# Altium PCB STM32F429_18Bit_20_09.PcbDoc (part 3 of 3)
Units mm, origin at the board's own origin, x right, y up, seen from the top; angles counter-clockwise.
Board outline 101.05 x 79.2 mm, 2 copper layers (Top Layer, Bottom Layer); 115 components, 171 nets, 599 pads, 391 vias.
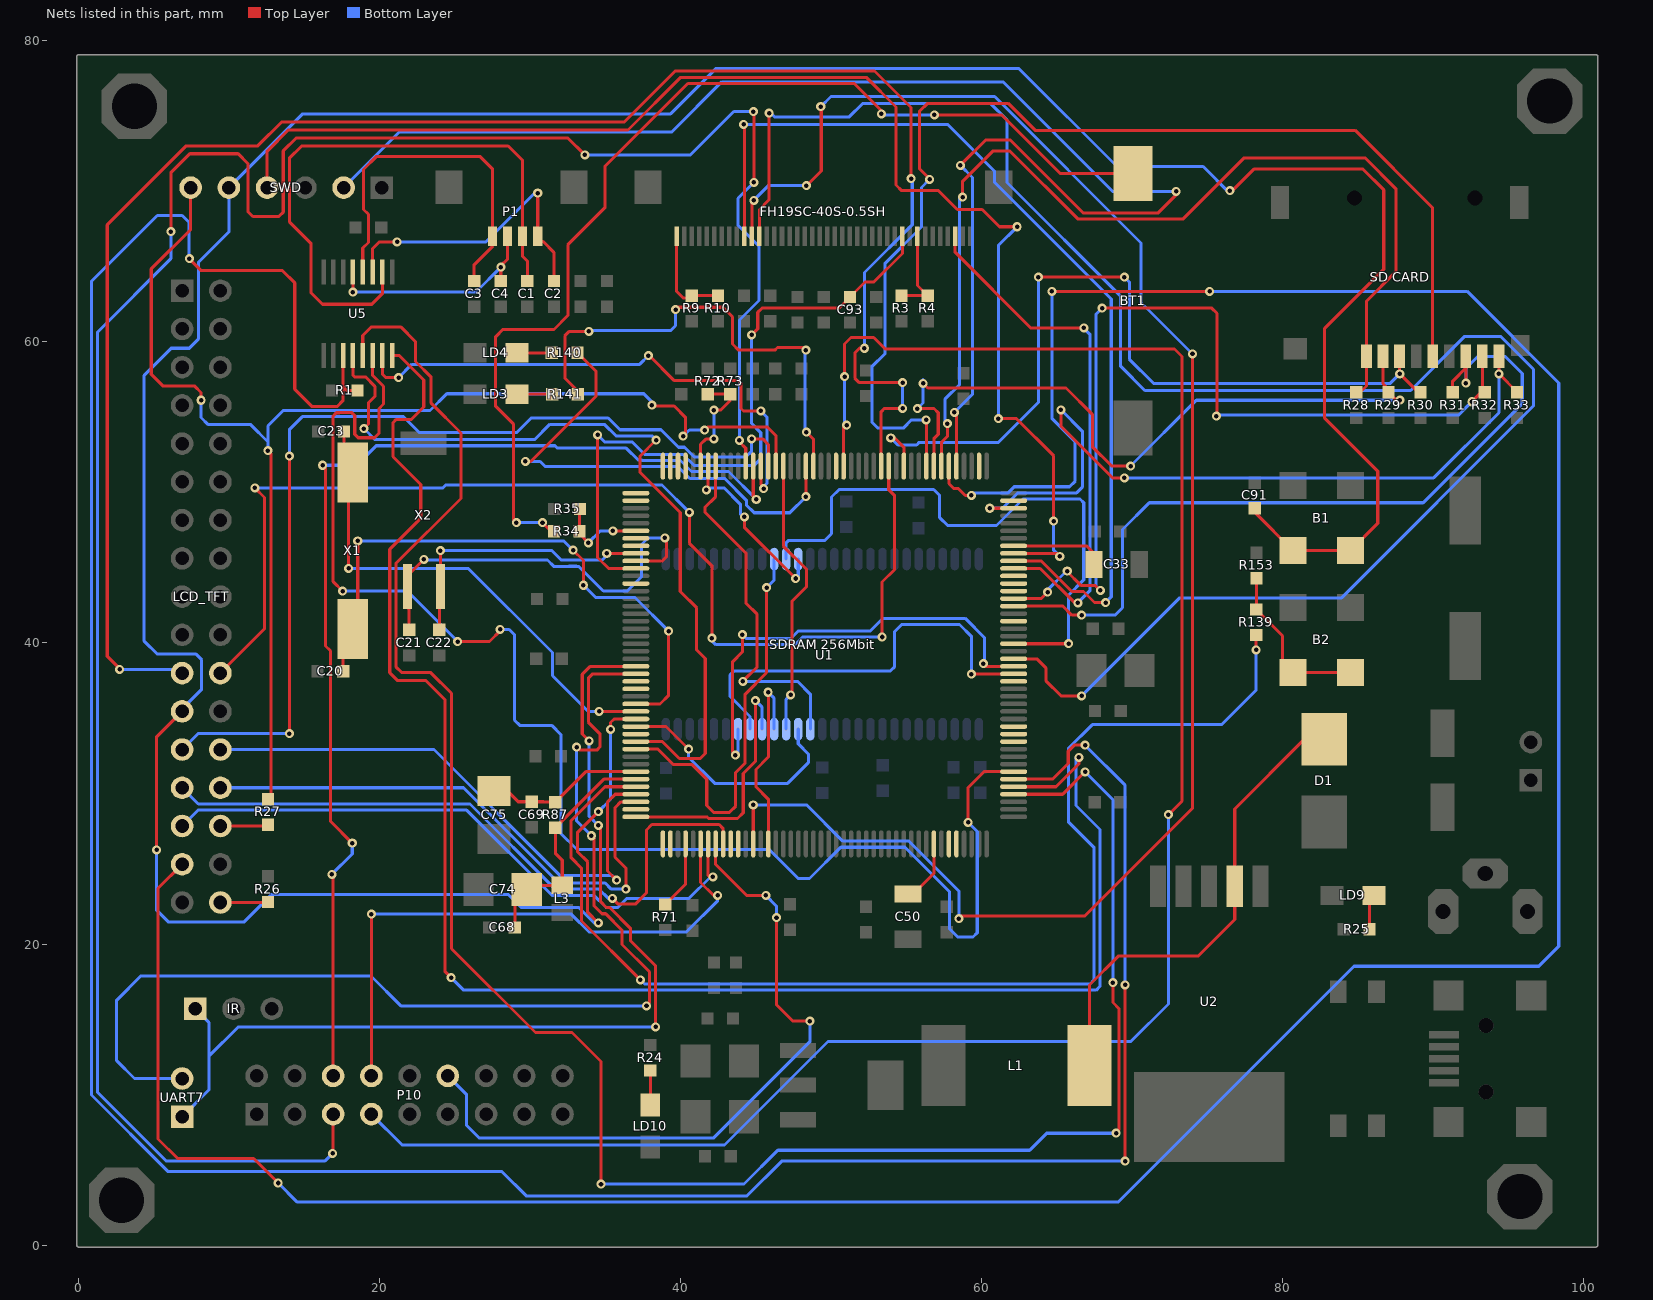
[diagram p3: the nets of this part, all layers, seen from the top]

## Via types
v1: diameter 0.6, hole 0.3, Top Layer to Bottom Layer, 380 vias
v2: diameter 0.8, hole 0.4, Top Layer to Bottom Layer, 9 vias
v3: diameter 1.016, hole 0.508, Top Layer to Bottom Layer, 1 vias
v4: diameter 1.27, hole 0.711, Top Layer to Bottom Layer, 1 vias

## Nets (pads, with @x,y where several pads share a name; then routed paths per layer and width w, separated by ;. In a path a pad name is that pad's centre, name@x,y a point inside that pad or via, vN(x,y) a via of type N, cw(c..) or ccw(c..) an arc to the next point about the centre after c; other vN are vias at no path point) (continued)
LTDC_R5: FH19SC-40S-0.5SH.31 U1.123 | length 64.6
  Top Layer w0.203: FH19SC-40S-0.5SH.31@44.225,67.025 v1@44.225,74.45 ; U1.123@62.116,45.449 63.95,45.449 65.981,43.419 66.756,43.419 67.488,42.687 v1(68.22,42.687)
  Bottom Layer w0.203: v1(44.175,74.45) 57.725,74.45 60.85,71.325 60.85,70.595 68.596,62.85 68.596,43.063 v1(68.22,42.687)
LTDC_R6: FH19SC-40S-0.5SH.30 U1.57 | length 115.6
  Top Layer w0.203: FH19SC-40S-0.5SH.30@44.725,67.025 44.725,69.275 v1(44.85,69.4) ; U1.57@44.816,26.649 v1(44.816,29.25) ; v1(48.35,70.375) 49.331,71.356 v1@49.331,75.625 ; v1(58.475,21.681) 58.644,21.85 66.823,21.85 73.995,29.022 v1(73.995,59.197)
  Bottom Layer w0.203: v1(44.816,29.25) 48.35,29.25 50.764,26.836 55.164,26.836 58.475,23.525 v1(58.475,21.681) ; v1(44.85,69.4) 45.85,70.4 48.375,70.4 v1(48.35,70.375) ; v1(49.3,75.625) 49.975,76.3 60.85,76.3 70.575,66.575 70.575,62.617 v1(73.995,59.197)
LTDC_R7: FH19SC-40S-0.5SH.29 U1.110 | length 121.6
  Top Layer w0.203: FH19SC-40S-0.5SH.29@45.225,67.025 45.225,68.8 45.85,69.425 v1@45.85,75.2 ; U1.110@62.116,38.949 63.651,38.949 64.25,38.35 64.25,37.5 65.261,36.489 v1(66.629,36.489)
  Bottom Layer w0.203: v1@45.925,75.25 46.225,74.95 51.2,74.95 52.075,75.825 60.6,75.825 61.675,74.75 61.675,70.583 69.225,63.033 69.225,58.375 70.825,56.775 88.489,56.775 92.08,60.365 94.46,60.365 96.65,58.175 96.65,55.75 83.9,43 73.14,43 v1(66.629,36.489)
  other v1: 45.875,75.2
LTDC_VSYNC: C93.1 FH19SC-40S-0.5SH.10 U1.11 | length 45.4
  Top Layer w0.203: v1(34.475,53.825) 34.472,53.822 34.472,45.683 35.206,44.949 U1.11@37.016,44.949 ; v1(44.706,60.461) 44.706,60.464 45.115,60.873 45.115,61.965 45.394,62.245 50.507,62.245 C93.1@51.244,62.982 52.237,63.975 52.825,63.975 54.725,65.875 FH19SC-40S-0.5SH.10@54.725,67.025
  Bottom Layer w0.203: v1(34.475,53.825) 34.472,53.822 34.945,53.35 36.782,53.35 37.607,52.525 40.15,52.525 40.875,51.8 44.875,51.8 45.313,52.238 45.313,53.969 44.709,54.574 44.709,60.467 44.706,60.464 v1(44.706,60.461)
NBL0: "SDRAM 256Mbit.15" U1.169 | length 23.6
  Top Layer w0.203: U1.169@42.316,51.749 42.316,49.716 41.6,49 41.6,48.7 44.325,45.975 44.325,42.65 45.075,41.9 45.075,38.4 v1(44.125,37.45)
  Bottom Layer w0.203: v1(44.125,37.45) 47.75,37.45 48.604,36.596 48.604,34.275
NBL1: "SDRAM 256Mbit.39" U1.170 | length 12.1
  Top Layer w0.203: v1(41.7,50.175) 41.816,50.291 U1.170@41.816,51.749 ; v1(44.225,48.375) 44.225,47.687 v1(47.63,44.282)
  Bottom Layer w0.203: v1@41.815,50.307 42.868,50.307 43.954,49.221 43.954,48.571 v1@44.225,48.3 ; v1(47.63,44.282) 47.804,44.456 47.804,45.575
NetB2_2: B2.2 B2.3 R139.1 R153.1 | length 11.1
  Top Layer w0.203: R153.1@78.25,44.3 78.25,42.25 R139.1@78.225,42.225 79.975,40.475 79.975,38.741 B2.2@80.676,38.04 B2.3@84.486,38.04
NetBT1_1: BT1.1 R34.1 | length 72
  Top Layer w0.203: v1(29.083,47.995) 28.9,48.178 28.9,54.525 27.7,55.725 27.7,60.349 28.176,60.825 31.575,60.825 32.5,61.75 32.5,66.45 34.955,68.905 34.955,71.655 40.469,77.169 51.531,77.169 53.325,75.375 v1(53.325,75.15) ; v1(30.815,47.995) 31.385,47.425 R34.1@31.575,47.425 ; v1(56.85,75.075) 61.325,75.075 65.225,71.175 BT1.1@70.05,71.175
  Bottom Layer w0.203: v1(29.083,47.995) v1(30.815,47.995) ; v1(53.325,75.15) 53.4,75.075 v1(56.85,75.075)
NetC33_1: C33.1 U1.125 | length 6.3
  Top Layer w0.203: U1.125@62.116,46.449 66.951,46.449 67.45,45.95 C33.1@67.45,45.225
NetC50_1: C50.1 U1.81 | length 4.2
  Top Layer w0.203: C50.1@55.1,23.325 55.45,23.325 56.816,24.691 U1.81@56.816,26.649
NetD1_2: D1.2 L1.1 U2.2 | length 32
  Top Layer w0.203: L1.1@67.15,11.925 67.15,17.275 69.093,19.217 74.392,19.217 76.8,21.625 U2.2@76.8,23.825 76.8,28.975 81.422,33.597 D1.2@82.75,33.597
NetFH19SC-40S-0.5SH_8: FH19SC-40S-0.5SH.8 R3.1 R4.2 | length 6.4
  Top Layer w0.203: R3.1@54.659,63.073 55.529,63.073 R4.2@56.401,63.073 ; FH19SC-40S-0.5SH.8@55.725,67.025 55.725,63.749 R4.2@56.401,63.073 ; 55.961,63.073 R4.2@56.401,63.073
NetLCD_TFT_30: LCD_TFT.30 R27.2 | length 3.2
  Top Layer w0.203: LCD_TFT.30@9.415,27.84 12.49,27.84 R27.2@12.575,27.925
NetLCD_TFT_34: LCD_TFT.34 R26.2 | length 3.2
  Top Layer w0.203: LCD_TFT.34@9.415,22.76 12.535,22.76 R26.2@12.575,22.8
NetLD3_1: LD3.1 R141.1 | length 2.4
  Top Layer w0.203: LD3.1@29.109,56.526 30.281,56.526 R141.1@31.459,56.526
NetLD4_1: LD4.1 R140.1 | length 2.3
  Top Layer w0.203: LD4.1@29.109,59.276 30.256,59.276 R140.1@31.434,59.276
NetLD9_1: LD9.1 R25.1 | length 2.6
  Top Layer w0.203: R25.1@85.75,20.975 85.75,23.225 LD9.1@86.05,23.225
NetLD10_1: LD10.1 R24.1 | length 2.3
  Top Layer w0.203: LD10.1@37.975,9.3 R24.1@37.975,11.6
NetR34_2: R34.2 R35.2 U1.6 | length 6
  Top Layer w0.203: R35.2@33.3,48.9 33.275,48.875 R34.2@33.275,47.425 33.275,47.237 v1(33.863,46.649) ; v1(35.488,47.449) U1.6@37.016,47.449
  Bottom Layer w0.203: v1(33.863,46.649) 34.663,47.449 v1(35.488,47.449)
NetR71_1: R71.1 U1.48 | length 4.6
  Top Layer w0.203: R71.1@38.975,22.625 40.316,23.966 U1.48@40.316,26.649
NetR72_1: R72.1 R73.1 U1.171 | length 7.6
  Top Layer w0.203: U1.171@41.316,51.749 41.316,53.191 41.662,53.537 42.173,53.537 v1(42.194,53.558) ; R72.1@41.8,56.525 R73.1@43.284,56.525 43.284,56.109 42.638,55.463 v1(42.194,55.463)
  Bottom Layer w0.203: v1(42.194,53.558) v1(42.194,55.463)
NRST: B1.2 B1.3 C91.2 LCD_TFT.23 SWD.5 U1.31 | length 223.6
  Top Layer w0.203: v1(5.186,26.253) 5.186,33.771 LCD_TFT.23@6.875,35.46 ; v1(34.523,21.402) 33.814,22.11 33.814,25.461 33.125,26.15 33.125,27.395 v1(34.523,28.793) ; v1(35.336,34.254) 35.336,34.711 35.574,34.949 U1.31@37.016,34.949 ; v1(76.475,70.05) 76.644,70.05 78.069,71.475 85.325,71.475 86.7,70.1 86.7,64.825 82.775,60.9 82.775,54.938 86.3,51.413 86.3,47.949 B1.3@84.486,46.135 B1.2@80.676,46.135 78.125,48.686 C91.2@78.125,48.95
  Bottom Layer w0.203: v1(5.186,26.253) 5.186,22.239 5.95,21.475 11,21.475 12.825,23.3 28.524,23.3 29.402,22.422 33.233,22.422 34.253,21.402 v1(34.523,21.402) ; LCD_TFT.23@6.875,35.46 6.875,35.625 8.175,36.925 8.175,38.875 7.775,39.275 5.2,39.275 4.356,40.119 4.356,57.781 6.153,59.578 7.353,59.578 7.954,60.179 7.954,65.274 9.981,67.3 SWD.5@9.981,70.249 14.881,75.15 39.325,75.15 42.325,78.15 62.475,78.15 68.975,71.65 74.7,71.65 76.472,69.878 76.644,70.05 v1(76.475,70.05) ; v1(34.523,28.793) 35.336,29.606 v1(35.336,34.254)
PA0: R139.2 U1.40 | length 81.9
  Top Layer w0.203: U1.40@37.016,30.449 34.965,30.449 32.719,28.203 32.719,25.731 33.408,25.042 33.408,21.526 v1(37.317,17.617) ; v1(78.225,39.537) R139.2@78.225,40.525
  Bottom Layer w0.203: v1(37.317,17.617) 37.592,17.342 67.192,17.342 67.442,17.592 67.442,26.433 65.75,28.125 65.75,32.985 67.342,34.577 75.927,34.577 78.225,36.875 v1(78.225,39.537)
PA1: LCD_TFT.26 U1.41 | length 37.5
  Top Layer w0.203: v1(35.742,24.246) 35.138,24.851 35.138,29.446 35.641,29.949 U1.41@37.016,29.949
  Bottom Layer w0.203: LCD_TFT.26@9.415,32.92 23.605,32.92 31.985,24.54 35.449,24.54 v1(35.742,24.246)
PA2: LCD_TFT.28 U1.42 | length 37
  Top Layer w0.203: v1(36.347,23.642) 36.347,25.053 35.625,25.775 35.625,29.057 36.018,29.449 U1.42@37.016,29.449
  Bottom Layer w0.203: LCD_TFT.28@9.415,30.38 25.57,30.38 31.902,24.048 34.98,24.048 35.387,23.642 v1(36.347,23.642)
PA4: P10.8 U1.50 | length 39.5
  Top Layer w0.203: P10.8@19.445,11.24 v1(19.445,21.986) ; U1.50@41.316,26.649 41.316,24.088 42.173,23.23 v1(42.448,23.23)
  Bottom Layer w0.203: v1(19.445,21.986) 32.729,21.986 33.918,20.797 40.37,20.797 42.448,22.875 v1(42.448,23.23)
PA5: LCD_TFT.29 U1.51 | length 41.7
  Top Layer w0.203: U1.51@41.816,26.649 41.816,24.549 41.939,24.425 42.125,24.425 42.131,24.431 v1(42.131,24.459)
  Bottom Layer w0.203: LCD_TFT.29@6.875,27.84 7.93,28.895 25.78,28.895 31.44,23.235 34.218,23.235 35.031,22.422 35.819,22.422 36.433,23.037 40.551,23.037 41.939,24.425 42.125,24.425 42.131,24.431 v1(42.131,24.459)
PA6: P10.12 U1.52 | length 46.8
  Top Layer w0.203: U1.52@42.316,26.649 42.316,25.279 44.364,23.23 v1(45.648,23.23) ; v1(46.36,21.757) 46.36,15.966 47.433,14.892 48.575,14.892 v1(48.575,14.875)
  Bottom Layer w0.203: P10.12@24.525,11.24 25.775,9.99 25.775,7.95 26.6,7.125 42.2,7.125 48.575,13.5 v1@48.575,14.892 ; v1(45.648,23.23) 46.36,22.519 v1(46.36,21.757)
PA7: LCD_TFT.27 U1.53 | length 44.9
  Top Layer w0.203: v1(35.463,23.037) 35.85,22.65 36.975,22.65 37.725,23.4 37.725,27.58 38.079,27.934 42.55,27.934 42.816,27.668 U1.53@42.816,26.649
  Bottom Layer w0.203: LCD_TFT.27@6.875,30.38 7.954,29.301 25.999,29.301 31.658,23.642 34.574,23.642 35.179,23.037 v1(35.463,23.037)
PA8: U1.119
PA9: U1.120
PA10: U1.121
PA11: FH19SC-40S-0.5SH.3 U1.122 | length 35.7
  Top Layer w0.203: FH19SC-40S-0.5SH.3@58.225,67.025 58.225,65.95 63.251,60.924 v1(66.772,60.924) ; U1.122@62.116,44.949 63.876,44.949 66.164,42.661 v1(66.375,42.661)
  Bottom Layer w0.203: v1(66.375,42.661) 67.178,43.465 67.178,60.518 v1(66.772,60.924)
PA13: SWD.4 U1.124 | length 89.5
  Top Layer w0.203: SWD.4@12.521,70.249 12.521,72.67 13.921,74.071 36.496,74.071 40,77.575 52.325,77.575 54.3,75.6 54.3,70.425 54.675,70.05 57.125,70.05 58.375,68.8 60.025,68.8 61.175,67.65 v1(62.35,67.65) ; v1@61.011,54.9 62.308,54.9 64.775,52.433 v1(64.775,48.097) ; U1.124@62.116,45.949 64.975,45.95 v1(65.175,45.75)
  Bottom Layer w0.203: v1(61.1,54.9) 61.1,66.4 v1(62.35,67.65) ; v1(64.775,48.097) 64.775,46.15 v1(65.175,45.75)
PA14: SWD.2 U1.137 | length 99.7
  Top Layer w0.203: v1(58.171,55.311) 58.318,55.163 58.318,53.159 58.316,53.156 U1.137@58.316,51.749 ; v1(58.575,71.725) 60.275,73.425 61.875,73.425 66.725,68.575 71.725,68.575 v1@72.95,69.8
  Bottom Layer w0.203: SWD.2@17.601,70.249 21.301,73.95 39.4,73.95 42.725,77.275 61.4,77.275 68.675,70 v1(72.9,70) ; v1(58.171,55.311) 59.381,56.521 59.381,70.919 v1(58.575,71.725)
PA15: LCD_TFT.31 U1.138 | length 217.9
  Top Layer w0.203: LCD_TFT.31@6.875,25.3 5.275,23.7 5.275,7.05 6.575,5.75 11.625,5.75 v1(13.25,4.125) ; U1.138@57.816,51.749 57.816,50.584 58.15,50.25 58.45,50.25 58.901,49.799 v1(59.301,49.799) ; v1(64.648,63.362) v1@75.125,63.362
  Bottom Layer w0.203: v1(13.25,4.125) 14.525,2.85 69.05,2.85 84.725,18.525 97,18.525 98.325,19.85 98.325,57.275 92.238,63.362 75.137,63.362 v1(75.125,63.35) ; v1(59.301,49.799) 59.479,49.977 61.752,49.977 62.153,50.378 65.828,50.378 66.2,50.75 66.2,53.375 64.648,54.927 v1(64.648,63.362)
PB3: R27.1 SWD.6 U1.161 | length 88.5
  Top Layer w0.203: SWD.6@7.441,70.249 7.441,67.466 4.825,64.85 4.825,57.85 5.612,57.063 7.712,57.063 8.133,56.642 v1(8.133,56.123) ; R27.1@12.575,29.625 12.775,29.825 12.775,52.573 v1(12.578,52.771) ; v1(38.075,55.8) 38.075,55.738 39.557,55.738 40.325,54.97 40.325,53.899 v1(40.162,53.736) ; v1(41.584,54.142) 41.783,54.341 45.753,54.341 46.316,53.778 U1.161@46.316,51.749
  Bottom Layer w0.203: v1(8.133,56.123) 8.133,54.98 8.613,54.5 11.432,54.5 12.578,53.355 ; v1(12.578,52.771) 12.578,53.355 ; v1@38.075,55.738 38.075,56.025 37.544,56.556 24.456,56.556 23.337,55.437 13.588,55.437 12.578,54.426 12.578,53.355 ; v1(40.162,53.736) 40.568,54.142 v1(41.584,54.142)
PB4: LCD_TFT.25 U1.162 | length 64.4
  Top Layer w0.203: v1(14,33.975) v1(14,52.415) ; v1(44.709,53.558) 45.442,53.558 45.816,53.184 U1.162@45.816,51.749
  Bottom Layer w0.203: LCD_TFT.25@6.875,32.92 7.93,33.975 v1(14,33.975) ; v1(14,52.415) 14,54.168 14.863,55.031 21.578,55.031 22.639,53.969 29.083,53.969 30.064,54.95 35.175,54.95 35.962,54.163 38.689,54.163 39.852,53 40.25,53 40.9,52.35 44.325,52.35 44.709,52.734 v1(44.709,53.558)
PB5: U1.163 U5.15 | length 36.6
  Top Layer w0.203: U5.15@20.175,59.1 20.175,57.873 20.423,57.625 v1(21.25,57.625) ; v1(37.851,59.095) 37.901,59.095 39.572,57.425 43.839,57.425 43.997,57.266 43.997,55.578 44.163,55.412 v1(45.318,55.412) ; U1.163@45.316,51.749 45.316,50.563 45.5,50.379 v1(45.5,50.25)
  Bottom Layer w0.203: v1(21.25,57.625) 22.136,58.511 37.266,58.511 v1(37.851,59.095) ; v1(45.318,55.412) 45.72,55.011 45.72,50.599 45.5,50.379 v1(45.5,50.25)
PB6: P10.6 U1.164 | length 75.1
  Top Layer w0.203: v1(16.21,51.805) 16.219,51.805 16.4,51.624 16.4,39.8 16.725,39.475 16.725,28.15 v1(18.175,26.7) ; v1(16.819,24.627) 16.905,24.627 P10.6@16.905,11.24 ; U1.164@44.816,51.749 44.816,51.064 44.815,49.743 v1(45.013,49.545)
  Bottom Layer w0.203: v1(16.21,51.805) 18.475,51.805 19.772,53.103 31.646,53.103 31.805,52.944 36.375,52.944 37.169,52.15 37.407,52.15 37.439,52.119 39.982,52.119 40.707,51.394 43.165,51.394 v1(45.013,49.545) ; v1(16.819,24.627) 18.175,25.983 v1(18.175,26.7)
PB7: P10.5 U1.165 | length 157.7
  Top Layer w0.203: v1(6.126,67.325) 6.126,71.236 7.39,72.5 10.6,72.5 11.257,71.843 11.257,68.643 11.575,68.325 13.3,68.325 13.594,68.619 13.594,72.694 14.45,73.55 32.5,73.55 v1(33.625,72.425) ; v1@16.905,6.1 P10.5@16.905,8.7 ; v1(43.896,53.456) 43.896,53.355 44.316,52.935 U1.165@44.316,51.749 ; v1(44.861,70.601) v1@44.861,75.3
  Bottom Layer w0.203: v1(6.126,67.325) 6.126,65.526 1.262,60.662 1.262,10.138 5.8,5.6 16.375,5.6 v1(16.875,6.1) ; v1(33.625,72.425) 40.65,72.425 43.525,75.3 v1(44.825,75.3) ; v1(43.896,53.456) 43.896,61.457 45.191,62.753 45.191,66.36 43.8,67.751 43.8,69.54 v1(44.861,70.601)
PB12: U1.92 U5.13 | length 138.7
  Top Layer w0.203: U5.13@18.875,59.1 18.875,60.425 19.45,61 21.392,61 22.375,60.017 22.375,58.7 23.419,57.656 23.419,55.931 25.4,53.95 25.4,49.6 21.075,45.275 21.075,38.425 21.475,38.025 23.4,38.025 24.775,36.65 24.775,19.694 30.344,14.125 32.775,14.125 34.701,12.199 v1(34.701,4.053) ; U1.92@62.116,29.949 65.372,29.949 v1(66.857,31.435) ; v1(68.712,17.439) 68.712,16.113 69.118,15.707 69.118,7.635 v1(68.915,7.432)
  Bottom Layer w0.203: v1(34.701,4.053) 44.203,4.053 46.45,6.3 63.175,6.3 64.307,7.432 v1(68.915,7.432) ; v1(66.857,31.435) 68.712,29.58 v1(68.712,17.439)
PB13: U1.93 U5.16 | length 113.3
  Top Layer w0.203: U5.16@20.825,59.1 21.3,59.1 22.925,57.475 22.925,55.675 22.106,54.856 21.106,54.856 20.883,54.633 20.883,52.374 22.725,50.532 22.725,48.275 20.669,46.219 20.669,38.031 21.2,37.5 23.075,37.5 24.325,36.25 24.325,18.189 v1(24.744,17.769) ; U1.93@62.116,30.449 64.924,30.449 66.451,31.976 v1(66.451,32.4)
  Bottom Layer w0.203: v1(24.744,17.769) 25.578,16.936 67.599,16.936 67.848,17.185 67.848,27.602 66.253,29.197 66.253,32.4 v1(66.451,32.4)
PB14: R1.2 U1.94 U5.11 | length 194.9
  Top Layer w0.203: v1(7.35,65.525) 8.141,64.734 13.543,64.734 14.356,63.921 14.356,56.86 15.516,55.7 17.158,55.7 17.575,56.117 17.575,57.012 ; U5.11@17.575,59.1 17.575,57.012 ; R1.2@18.525,56.775 17.812,56.775 17.575,57.012 ; U1.94@62.116,30.949 64.699,30.949 65.74,31.99 65.74,32.815 66.138,33.213 v1(66.857,33.213) ; v1(69.524,5.577) v1(69.524,17.287)
  Bottom Layer w0.203: v1@7.345,65.525 7.345,67.93 6.875,68.4 5.225,68.4 0.856,64.031 0.856,9.969 5.95,4.875 28.125,4.875 29.725,3.275 44.4,3.275 46.702,5.577 v1(69.524,5.577) ; v1(66.857,33.213) 69.524,30.546 v1(69.524,17.287)
PB15: U1.95 U5.14 | length 98.4
  Top Layer w0.203: v1(17.531,43.449) 16.905,44.075 16.905,55.08 17.119,55.294 17.326,55.294 17.333,55.3 18.15,55.3 18.343,55.107 18.343,53.863 18.572,53.634 19.659,53.634 19.95,53.925 19.95,55.565 20.256,55.872 20.256,57.049 19.525,57.78 U5.14@19.525,59.1 ; v1(25.176,40.096) 27.296,40.096 v1@28.05,40.85 ; v1(59.085,28.082) 59.085,30.385 60.149,31.449 U1.95@62.116,31.449
  Bottom Layer w0.203: v1(17.531,43.449) 21.823,43.449 v1(25.176,40.096) ; v1(28,40.9) 28.6,40.9 28.95,40.55 28.95,34.875 29.3,34.525 31.425,34.525 32.034,33.916 32.034,27.345 33.106,26.274 45.876,26.274 47.8,24.35 48.55,24.35 50.63,26.43 54.895,26.43 57.866,23.459 57.866,20.995 58.399,20.462 59.415,20.462 59.695,20.741 59.695,27.472 v1(59.085,28.082)
PC0: "SDRAM 256Mbit.16" U1.32 | length 16.4
  Top Layer w0.203: U1.32@37.016,34.449 39.019,34.449 v1(40.518,32.951)
  Bottom Layer w0.203: v1(40.518,32.951) 40.518,32.407 42.248,30.677 47.102,30.677 48.475,32.05 48.475,32.625 47.804,33.296 47.804,34.275
PC1: U1.33
PC2: U1.34 U5.12 | length 55
  Top Layer w0.203: U5.12@18.225,59.1 18.225,57.775 18.325,57.675 19.05,57.675 19.675,57.05 19.675,56.375 19.258,55.958 19.258,54.549 v1(18.953,54.244) ; U1.34@37.016,33.449 38.776,33.449 39.901,32.324 41.299,32.324 41.627,32.652 41.627,38.966 41.056,39.537 41.056,42.333 39.964,43.425 39.964,48.661 37.3,51.325 37.3,52.418 v1(38.359,53.477)
  Bottom Layer w0.203: v1(18.953,54.244) 19.688,53.509 30.286,53.509 31.302,54.525 34.925,54.525 35.694,53.756 38.079,53.756 v1(38.359,53.477)
PC3: "SDRAM 256Mbit.37" U1.35 | length 27
  Top Layer w0.203: U1.35@37.016,32.949 38.486,32.949 39.518,31.917 40.758,31.917 41.725,30.95 41.725,29.2 42.178,28.747 43.24,28.747 43.65,29.157 43.65,31.4 44.277,32.027 44.277,36.602 45.699,38.024 v1(45.699,43.677)
  Bottom Layer w0.203: v1(45.699,43.677) 46.204,44.182 46.204,45.575
PC4: U1.54
PC5: U1.55
PC6: U1.115
PC8: "SD CARD.7" R31.2 U1.117 | length 54.2
  Top Layer w0.203: U1.117@62.116,42.449 65.376,42.449 65.976,41.849 v1(66.629,41.849) ; R31.2@91.28,56.65 91.28,57.393 92.15,58.263 ; 92.15,59.05 92.15,58.263 ; v1(92.156,57.266) 92.15,57.272 92.15,58.263
  Bottom Layer w0.203: v1(66.629,41.849) 68.849,41.849 69.347,42.347 69.347,47.538 71.125,49.316 89.316,49.316 95.9,55.9 95.9,57.9 94.775,59.025 92.949,59.025 92.156,58.232 v1(92.156,57.266)
PC9: "SD CARD.8" R32.2 U1.118 | length 61.6
  Top Layer w0.203: U1.118@62.116,42.949 63.949,42.949 v1(64.375,43.375) ; v1(65.675,44.775) 65.625,44.775 66.575,43.825 67.523,43.825 67.848,43.5 v1(67.875,43.5) ; v1(67.991,62.245) 75.28,62.245 75.625,61.9 v1@75.625,55.315 ; v1(92.55,56.025) 93.175,56.65 R32.2@93.415,56.65 93.25,56.815 93.25,59.05
  Bottom Layer w0.203: v1(64.375,43.375) 64.35,43.4 64.35,43.5 65.625,44.775 v1(65.675,44.775) ; v1@67.848,43.5 v1(67.875,43.5) 67.584,43.791 67.584,61.838 v1(67.991,62.245) ; v1(75.575,55.075) 75.636,55.136 91.661,55.136 v1(92.55,56.025)
PC10: "SD CARD.1" R28.2 U1.139 | length 68.3
  Top Layer w0.203: U1.139@57.316,51.749 57.316,53.333 57.713,53.73 v1(57.713,54.574) ; v1(58.725,69.625) 58.725,70.675 60.725,72.675 61.875,72.675 66.4,68.15 73.35,68.15 77.425,72.225 85.45,72.225 87.5,70.175 87.5,64.65 85.55,62.7 85.55,59.05 85.55,57.075 85.125,56.65 R28.2@84.875,56.65
  Bottom Layer w0.203: v1(57.713,54.574) 57.566,54.722 57.566,56.216 58.526,57.176 v1@58.526,69.625
PC11: "SD CARD.2" R29.2 U1.140 | length 48
  Top Layer w0.203: v1(55.725,55.575) 56.825,55.575 57.106,55.294 57.106,53.856 56.816,53.566 U1.140@56.816,51.749 ; v1(56.1,57.25) 56.414,56.936 65.589,56.936 67.34,55.185 67.34,53.035 68.62,51.755 v1(69.88,51.755) ; 86.65,59.05 86.65,57.225 87.01,56.865 R29.2@87.01,56.65 87.535,56.125 v1(87.775,56.125)
  Bottom Layer w0.203: v1(55.725,55.575) 56.088,55.938 56.088,57.488 56.1,57.5 v1(56.1,57.25) ; v1(69.88,51.755) 74.25,56.125 v1(87.775,56.125)
PC12: "SD CARD.5" U1.141 | length 76.7
  Top Layer w0.203: v1(56.3,54.825) 56.3,54.768 56.316,54.784 U1.141@56.316,51.749 ; v1(56.525,70.8) 56.55,70.825 55.85,71.525 55.85,75.3 56.4,75.85 61.75,75.85 63.55,74.05 84.8,74.05 89.95,68.9 89.95,59.05
  Bottom Layer w0.203: v1(56.3,54.825) 55.331,54.825 54.78,54.274 53.101,54.274 52.691,54.684 52.691,58.349 53.575,59.234 53.575,65.225 55.986,67.636 55.986,70.261 v1(56.525,70.8)
PC13: U1.8
PC14: C22.1 U1.9 X2.1 | length 18.8
  Top Layer w0.203: C22.1@23.959,40.876 23.959,42.255 24.034,42.329 X2.1@24.034,43.741 v1(24.034,46.131) ; v1(35.082,45.949) U1.9@37.016,45.949
  Bottom Layer w0.203: v1(24.034,46.131) 31.452,46.131 32.083,45.5 32.411,45.5 32.412,45.501 33.25,45.501 33.251,45.5 34.766,45.5 35.082,45.816 v1(35.082,45.949)
PC15: C21.1 U1.10 X2.2 | length 28.4
  Top Layer w0.203: C21.1@21.959,40.876 21.959,42.23 21.835,42.354 X2.2@21.835,43.741 21.835,44.451 v1(22.941,45.557) ; U1.10@37.016,45.449 38.774,45.449 39.049,45.724 39.049,46.975 v1(38.95,46.975)
  Bottom Layer w0.203: v1(22.941,45.557) 22.992,45.506 31.145,45.506 31.558,45.094 32.579,45.094 32.58,45.095 33.081,45.095 33.083,45.094 33.209,45.094 34.853,43.449 36.454,43.449 37.393,44.389 37.393,46.543 37.825,46.975 v1@39.049,46.975
PD2: "SD CARD.3" R30.2 U1.144 | length 55.1
  Top Layer w0.203: v1(53.95,53.625) 54.2,53.625 54.816,53.009 U1.144@54.816,51.749 ; v1(63.759,64.302) v1(69.474,64.302) ; v1@87.75,57.876 87.75,59.05 ; v1(87.762,57.876) 88.988,56.65 R30.2@89.145,56.65
  Bottom Layer w0.203: v1(53.95,53.625) 54.42,53.155 55.669,53.155 55.843,53.329 61.104,53.329 63.759,55.984 v1(63.759,64.302) ; v1(69.474,64.302) 69.8,63.976 69.8,58.85 71.4,57.25 87.136,57.25 v1(87.762,57.876)
PD4: LCD_TFT.22 U1.146 | length 76.1
  Top Layer w0.203: LCD_TFT.22@9.415,38 12.35,40.935 12.35,49.664 v1(11.709,50.304) ; v1(40.568,48.681) 40.568,46.632 42.067,45.133 v1(42.067,40.325) ; v1(53.37,40.396) 53.37,44.045 54.205,44.88 54.205,49.779 53.816,50.168 U1.146@53.816,51.749
  Bottom Layer w0.203: v1(11.709,50.304) 24.199,50.304 24.402,50.508 36.751,50.508 36.765,50.493 38.757,50.493 v1(40.568,48.681) ; v1(42.067,40.325) 42.067,40.147 42.326,39.888 47.588,39.888 48.096,40.396 v1(53.37,40.396)
PD5: LCD_TFT.21 U1.147 | length 122.6
  Top Layer w0.203: v1@2.725,38.293 1.9,39.118 1.9,67.775 7.15,73.025 11.9,73.025 13.475,74.6 36.225,74.6 39.625,78 52.875,78 55.3,75.575 v1(55.3,70.85) ; v1(52.202,59.578) 51.878,59.578 51.567,59.267 51.567,57.59 51.867,57.29 v1(54.742,57.29) ; U1.147@53.316,51.749 53.316,55.366 53.54,55.59 v1(54.742,55.59)
  Bottom Layer w0.203: v1(2.725,38.25) 6.625,38.25 LCD_TFT.21@6.875,38 ; v1(52.202,59.578) 52.202,64.607 55.377,67.782 v1@55.377,70.85 ; v1(54.742,55.59) v1(54.742,57.29)
PD11: U1.99
PD12: U1.100
PD13: U1.101
PE2: U1.1
PE3: U1.2
PF6: IR.1 U1.24 UART7.1 | length 68.2
  Top Layer w0.203: v1(33.914,33.492) 33.456,33.949 33.456,37.912 33.994,38.449 U1.24@37.016,38.449 ; v1(34.523,27.879) 34.523,27.782 34.675,27.782 34.675,22.8 35.053,22.422 35.278,22.422 36.675,21.025 36.675,20.2 38.328,18.547 v1(38.328,14.493)
  Bottom Layer w0.203: UART7.1@6.875,8.525 8.65,10.3 8.65,12.55 ; IR.1@7.75,15.7 8.65,14.8 8.65,12.55 ; v1(33.914,33.492) 33.914,28.488 v1(34.523,27.879) ; v1(38.328,14.493) 10.593,14.493 8.65,12.55
PF7: U1.25 UART7.2 | length 74.9
  Top Layer w0.203: v1(33.075,33.086) 33.279,32.882 34.422,32.882 34.625,33.086 34.625,33.975 33.863,34.737 33.863,37.663 34.149,37.949 U1.25@37.016,37.949 ; v1(34.066,27.193) 34.244,27.015 34.244,22.531 34.764,22.011 35.014,22.011 36.1,20.925 36.1,19.975 37.922,18.153 37.922,16.088 v1(37.724,15.89)
  Bottom Layer w0.203: UART7.2@6.875,11.065 3.712,11.065 2.525,12.252 2.525,16.275 4.125,17.875 19.419,17.875 21.404,15.89 v1(37.724,15.89) ; v1(33.075,33.086) 33.075,28.183 v1(34.066,27.193)
PF8: U1.26
PF9: U1.27
PF11: "SDRAM 256Mbit.18" U1.59 | length 13.4
  Top Layer w0.203: v1(45.8,36.725) 45.821,36.704 45.821,32.422 44.993,31.593 44.993,30.444 45.816,29.622 U1.59@45.816,26.649
  Bottom Layer w0.203: v1(45.8,36.725) 46.204,36.321 46.204,34.275
PG3: U1.107
PG4: "SDRAM 256Mbit.20" U1.108 | length 28.6
  Top Layer w0.203: v1(59.3,37.925) 59.317,37.942 61.442,37.942 61.442,37.949 U1.108@62.116,37.949
  Bottom Layer w0.203: 44.604,34.275 44.604,35.121 43.281,36.443 43.281,37.881 43.549,38.149 53.929,38.149 54.208,38.428 54.208,40.756 54.681,41.229 58.521,41.229 59.3,40.45 v1(59.3,37.925)
PG5: "SDRAM 256Mbit.21" U1.109 | length 31.4
  Top Layer w0.203: v1(43.625,32.55) 43.425,32.75 43.425,38.725 44.094,39.394 v1(44.094,40.553) ; v1(60.1,38.625) 60.276,38.449 U1.109@62.116,38.449
  Bottom Layer w0.203: v1(43.625,32.55) 43.616,32.559 43.804,32.746 43.804,34.275 ; v1(44.094,40.553) 44.346,40.302 47.325,40.302 47.826,40.802 52.602,40.802 53.436,41.636 58.889,41.636 60.178,40.347 60.178,38.547 v1(60.1,38.625)
PG8: "SDRAM 256Mbit.38" U1.112 | length 39.9
  Top Layer w0.203: U1.112@62.116,39.949 v1(65.765,39.949)
  Bottom Layer w0.203: 47.004,45.575 47.004,46.654 47.17,46.82 49.578,46.82 50.017,47.259 50.017,49.697 50.52,50.2 56.8,50.2 57.2,49.8 57.2,48.325 57.728,47.797 60.972,47.797 62.74,49.565 66.527,49.565 66.772,49.321 66.772,44.197 65.765,43.19 v1(65.765,39.949)
PG9: P10.7 U1.152 | length 133.2
  Top Layer w0.203: U1.152@50.816,51.749 50.805,52.491 50.805,54.443 50.836,54.475 51.025,54.286 v1(51.025,54.475) ; v1(50.881,57.698) 50.881,59.857 51.313,60.289 52.811,60.289 53.575,59.525 72.8,59.525 73.3,59.025 73.3,29.495 v1(72.395,28.59)
  Bottom Layer w0.203: P10.7@19.445,8.7 21.495,6.65 42.9,6.65 49.778,13.528 69.903,13.528 72.395,16.02 v1(72.395,28.59) ; v1(50.881,57.698) 50.881,54.431 51.025,54.286 v1(51.025,54.475)
PG10: U1.153
PG13: R141.2 U1.156 | length 32
  Top Layer w0.203: R141.2@33.159,56.526 33.159,56.741 32.3,57.6 32.3,60.4 32.6,60.7 v1(33.9,60.7) ; v1(39.654,62.143) 39.811,62.3 42.799,62.3 43.439,61.661 43.439,59.857 43.846,59.45 46.25,59.45 46.424,59.624 48.142,59.624 v1(48.315,59.451) ; v1(48.35,54) 48.816,53.534 U1.156@48.816,51.749
  Bottom Layer w0.203: v1@33.9,60.746 39.324,60.746 39.654,61.076 v1(39.654,62.143) ; v1@48.244,54 48.244,59.451 v1(48.315,59.451)
PG14: R140.2 U1.157 | length 32.6
  Top Layer w0.203: v1(29.672,52.059) 30.027,52.059 34.375,56.407 34.375,58.035 R140.2@33.134,59.276 ; v1(48.316,49.723) U1.157@48.316,51.749
  Bottom Layer w0.203: v1(29.672,52.059) 30.66,52.059 30.993,51.727 37.256,51.727 37.27,51.712 39.814,51.712 40.601,50.925 42.925,50.925 44.36,49.49 44.36,49.162 44.872,48.65 47.243,48.65 v1(48.316,49.723)
PG15: "SDRAM 256Mbit.17" U1.160 | length 18.6
  Top Layer w0.203: U1.160@46.816,51.749 46.816,46.434 48.366,44.884 48.366,43.749 47.401,42.784 v1@47.401,36.55
  Bottom Layer w0.203: 47.004,34.275 47.004,36.254 v1(47.3,36.55)
PH0: C20.1 U1.29 X1.2 | length 39.8
  Top Layer w0.203: C20.1@17.575,38.125 17.575,39.207 18.209,39.841 X1.2@18.209,40.93 18.209,41.709 18.542,42.042 v1(18.542,46.779) ; v1(32.847,46.167) 33.533,45.481 v1(33.533,43.835) ; U1.29@37.016,35.949 38.624,35.949 39.195,36.52 39.195,40.78 v1(39.197,40.782)
  Bottom Layer w0.203: v1(18.542,46.779) 32.235,46.779 v1(32.847,46.167) ; v1(33.533,43.835) 34.345,43.022 36.957,43.022 v1(39.197,40.782)
PH1: C23.1 U1.30 X1.1 | length 33.4
  Top Layer w0.203: C23.1@17.625,54.05 17.625,52.974 18.209,52.39 X1.1@18.209,51.321 18.209,50.584 17.937,50.312 v1(17.937,44.952) ; v1(34.572,35.449) U1.30@37.016,35.449
  Bottom Layer w0.203: v1(17.937,44.952) 25.887,44.952 31.475,39.364 31.475,37.825 33.851,35.449 v1(34.572,35.449)
PH2: U1.43
PH3: "SDRAM 256Mbit.19" U1.44 | length 17.2
  Top Layer w0.203: U1.44@37.016,28.449 41.734,28.449 41.843,28.341 43.769,28.341 44.15,28.722 44.15,31.325 44.95,32.125 v1(44.95,36.175)
  Bottom Layer w0.203: v1(44.95,36.175) 45.404,35.721 45.404,34.275
PH4: U1.45
PH5: U1.46
PH6: U1.83
PH7: U1.84
PH15: "SD CARD.9" R33.1 U1.130 | length 52.9
  Top Layer w0.203: v1(60.525,48.95) U1.130@62.116,48.949 ; v1(65.257,55.488) 65.257,54.393 68.683,50.967 v1(69.474,50.967) ; 94.35,59.05 v1(94.35,57.876) 95.55,56.676 R33.1@95.55,56.65
  Bottom Layer w0.203: v1(60.525,48.95) 61.374,48.949 62.397,49.972 66.297,49.972 66.675,50.35 66.675,54.071 v1(65.257,55.488) ; v1(69.474,50.967) 90.017,50.967 94.35,55.3 v1(94.35,57.876)
PI0: U1.131
PI3: U1.134
PI4: U1.173
PI5: U1.174
PI6: U1.175
PI7: U1.176
PI8: U1.7
PI11: U1.13
U/D: FH19SC-40S-0.5SH.40 R9.1 R10.2 | length 6.7
  Top Layer w0.203: FH19SC-40S-0.5SH.40@39.725,67.025 39.725,63.35 40.16,62.915 40.567,62.915 R9.1@40.725,63.073 R10.2@42.467,63.073
VDDA: C68.1 C74.1 L3.1 R87.2 U1.39 | length 16.5
  Top Layer w0.203: C68.1@28.975,21.1 28.975,23.624 C74.1@29.766,23.624 30.041,23.9 L3.1@32.125,23.9 32.125,25.567 31.666,26.027 R87.2@31.666,27.724 34.891,30.949 U1.39@37.016,30.949
VREF+: C69.1 C75.1 R87.1 U1.38 | length 10.6
  Top Layer w0.203: C75.1@27.6,30.175 28.478,30.175 29.203,29.45 C69.1@30.1,29.45 30.866,29.45 30.891,29.424 R87.1@31.666,29.424 33.69,31.449 U1.38@37.016,31.449
X+: C1.1 P1.2 U5.2 | length 40.7
  Top Layer w0.203: U5.2@20.175,64.65 20.175,63.2 19.475,62.5 16.2,62.5 15.422,63.278 15.422,66.563 14,67.985 14,72.2 14.814,73.014 28.535,73.014 29.5,72.049 P1.2@29.5,67.025 29.5,65.674 29.805,65.369 C1.1@29.805,64.041
X-: C3.1 P1.4 U5.4 | length 24.3
  Top Layer w0.203: U5.4@18.875,64.65 18.875,66.233 19.25,66.608 19.25,68.475 18.925,68.8 18.925,71.45 19.8,72.325 26.65,72.325 27.5,71.475 P1.4@27.5,67.025 27.5,66.36 26.275,65.135 C3.1@26.275,64.041
Y+: C2.1 P1.1 U5.3 | length 20.6
  Top Layer w0.203: U5.3@19.525,64.65 19.525,66.195 19.98,66.65 v1(21.15,66.65) ; v1(30.5,69.89) P1.1@30.5,67.025 30.5,66.664 30.859,66.664 31.57,65.953 C2.1@31.57,64.041
  Bottom Layer w0.203: v1(21.15,66.65) 27.067,66.65 30.307,69.89 v1(30.5,69.89)
Y-: C4.1 P1.3 U5.5 | length 15
  Top Layer w0.203: v1(18.225,63.312) U5.5@18.225,64.65 ; C4.1@28.04,64.041 v1@28.04,64.957 ; v1(28.046,64.963) v1@28.04,64.957 ; P1.3@28.5,67.025 28.5,65.512 28.04,65.052 v1@28.04,64.957
  Bottom Layer w0.203: v1(18.225,63.312) 26.395,63.312 v1(28.046,64.963)
pads on no net: "SDRAM 256Mbit.40" CONNUSB. CONNUSB.2 CONNUSB.3 FH19SC-40S-0.5SH.41 FH19SC-40S-0.5SH.42 LCD_TFT.24 LCD_TFT.32 P1.5 P1.6 P10.18 U3.4 U5.7 U5.8 VIT1.VIT1 VIT2.VIT1 VIT3.VIT1 VIT4.VIT1 X2.3

## Polygon pours and split planes (outlines as drawn)
GND on Top Layer "Bottom Layer-No Net" (solid, pour order 4): 0,78.95 100.8,78.95 100.8,0 0,0 0.025,0.025 0.025,78.95
GND on Bottom Layer "Bottom Layer-No Net" (solid, pour order 6): 0,78.95 100.8,78.95 100.8,0 0,0 0,78.95

## Keep-outs
Keep-Out Layer:
  lines w0.254: 0,78.95 0,0 100.8,0 100.8,78.95 0.025,78.95

## Silkscreen, mask and mechanical layers (free items; w line width, h text height)
Top Overlay:
  text "NRST" at 10.391,71.824 h0.8 r90
  text "SWDIO" at 12.916,71.824 h0.8 r90
  text "GND" at 15.516,71.824 h0.8 r90
  text "SWCLK" at 18.241,71.824 h0.8 r90
  text "VDD" at 20.291,71.824 h0.8 r90
  text "SWO" at 7.9,71.8 h0.8 r90
  text "-" at 12.425,63.975 h1 r180
  text "+" at 3.2,62.925 h1 r90
  text "D0" at 2.5,60.425 h1
  text "D1" at 11.25,60.4 h1
  text "RESET" at 80.25,52.4 h1
  text "STM32F429IIT6" at 42.2,39.3 h1.2
  text "-" at 98.55,33 h1
  text "+" at 98.525,30.275 h1
  text "-" at 10.725,17.575 h1 r90
  text "OUT" at 6.225,17.55 h1
  text "+" at 13.475,17.525 h1 r90
  text "TX" at 2.8,10.85 h1
  text "RX" at 3,7.575 h1
  text "EEXT" at 84.225,2.925 h1 r90
  text "EUSB" at 86.825,2.925 h1 r90

## Text inside footprints (layer, text, board x,y; h text height)
BT1: Top Overlay "+" at 70.85,67.275 h0.8 r90; Top Overlay "-" at 70.85,57.075 h0.8 r90
FH19SC-40S-0.5SH: Top Overlay "40" at 40.825,65.925 h1.5 r180; Top Overlay "1" at 59.475,65.925 h1.5 r180
LCD_TFT: Top Overlay "34" at 8.907,21.236 h0.8 r270; Top Overlay "33" at 6.367,21.236 h0.8 r270; Top Overlay "1" at 6.367,66.448 h0.8 r270; Top Overlay "2" at 8.907,66.448 h0.8 r270
P1: Top Overlay "1" at 32.475,67.172 h0.8 r180; Top Overlay "4" at 26.6,67.3 h0.8 r180
P10: Top Overlay "2" at 8.777,10.732 h1.27; Top Overlay "1" at 9.285,8.192 h1.27; Top Overlay "17" at 34.177,8.192 h1.27; Top Overlay "18" at 34.177,10.732 h1.27
S1: Top Overlay "1" at 83.553,9.708 h1; Top Overlay "2" at 85.839,9.708 h1; Top Overlay "ON" at 82.791,14.153 h1; Mechanical 14 "1" at 83.553,9.708 h1; Mechanical 14 "2" at 85.839,9.708 h1; Mechanical 14 "ON" at 82.791,14.153 h1